# Altium PCB PCB_BSPD_Sensorboard.PcbDoc
Units mm, origin at the board's own origin, x right, y up, seen from the top; angles counter-clockwise.
Board outline 14.73 x 48.77 mm, 2 copper layers (Top Layer, Bottom Layer); 5 components, 3 nets, 15 pads, 0 vias.
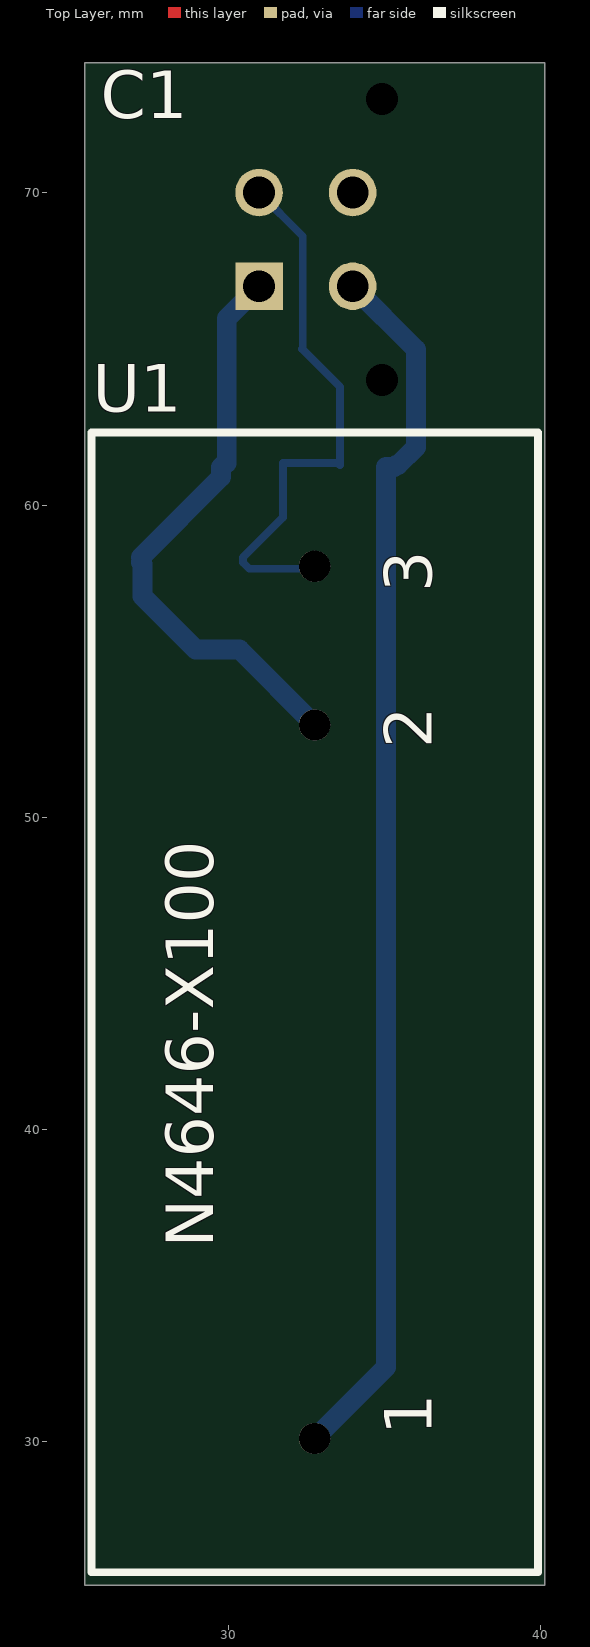
[diagram p0: Top Layer view]
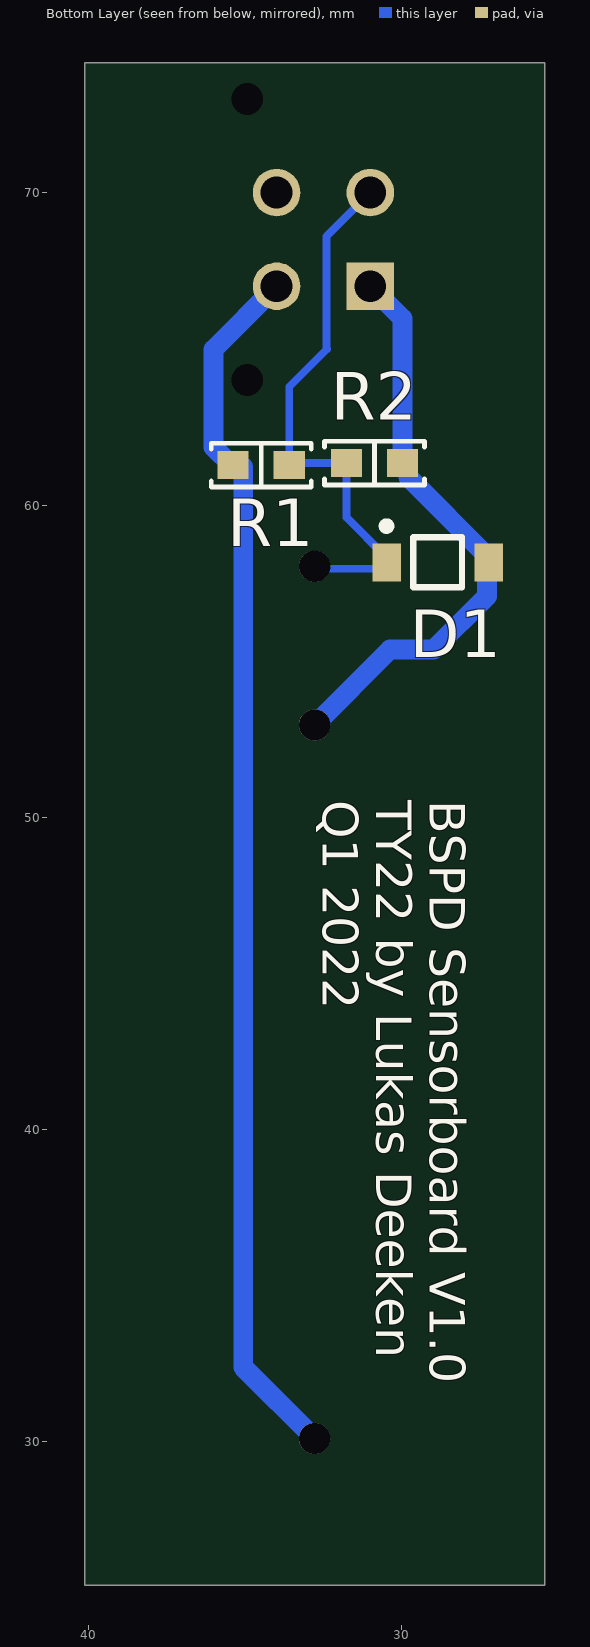
[diagram p1: Bottom Layer view, seen from below]

## Layer stack, top to bottom
Top Solder: solder mask 0.0102, Solder Resist, Dk 3.5
Top Layer: signal copper 0.0356
Dielectric 1: dielectric 0.32, FR-4, Dk 4.8
Bottom Layer: signal copper 0.0356
Bottom Solder: solder mask 0.0102, Solder Resist, Dk 3.5

## Board outline
25.4,74.168 40.132,74.168 40.132,25.4 25.4,25.4

## Design rules (kind name [scope] priority, off if disabled: settings)
Clearance [All] p1: gap=0.254 ignorepadtopadclearanceinfootprint=FALSE except(0: Arc-Hole Track-Hole SMDPad-Hole THPad-Hole Via-Hole Fill-Hole Poly-Hole Region-Hole Text-Hole)
PolygonConnect [All] p1: connectstyle=Relief reliefconductorwidth=0.254 reliefentries=4 polygonreliefangle="90 Angle" airgapwidth=0.254
RoutingVias [All] p1: holewidth=0.711 width=1.27 viastyle="Through Hole" minholewidth=0.711 minwidth=1.27 maxholewidth=0.711 maxwidth=1.27
SolderMaskExpansion [All] p1: expansion=0.102 istentingtop=FALSE
Width [All] p1: maxlimit=1.27 minlimit=0.254 preferedwidth=0.254
30 further rules are at their usual default settings.

## Components (designator, comment, footprint, x,y, rotation, side; value= is the part's Value field where it differs from the comment)
C1 "43045-0412" 43045-0412 32.485,68.508 r270 top
D1 "SZMMSZ4687T1G" ONSC-SOD-123-2-425-04_V 28.829,58.166 r180 bottom
R1 "SMD Resistor" "STACKPOLE CSR0603" 34.48,61.277 r0 bottom value=23,5k
R2 "SMD Resistor" "STACKPOLE CSR0603" 30.85,61.341 r0 bottom value=500
U1 "N4646-X100" N4646-X100 32.766,52.959 r90 top

## Footprints (in the part's own frame and the unit in brackets; to place one, negate y for a bottom-side part, rotate by r counter-clockwise, add the part's x,y. Pads: shape width x height; smd on the part's side, far side on the other; paste and mask are expansions set on the pad)
43045-0412 [mm]
  rect 1.524x1.524 hole 1.02: 1(1.5,-1.5)
  round 1.524 hole 1.02: 2(-1.5,-1.5) 3(1.5,1.5) 4(-1.5,1.5)
  round 0 hole 1.02 unplated: ""(-4.5,2.44) ""(4.5,2.44)
  body extent -5.07,-3.95 5.08,4.82, height 9.95
N4646-X100 [mm]
  round 1 hole 1: 1(-22.86,0) 2(0,0) 3(5.08,0)
  silkscreen extent -27.14,-7.15 9.36,7.15, body extent -27.13,-7.18 9.37,7.12, height 3
ONSC-SOD-123-2-425-04_V [mm] "SOD, 2-Leads, Body 2.69x1.6mm"
  rect 0.91x1.22 smd: 1(-1.635,0) 2(1.635,0)
  silkscreen extent -1.76,-0.8 0.78,1.28, body extent -1.35,-0.8 1.35,0.8, height 1.35
"STACKPOLE CSR0603" [mm] "Chip Resistor, 2-Leads, Body 1.60x0.80mm, IPC Medium Density"
  rect 1x0.9 smd: 1(-0.9,0) 2(0.9,0)
  silkscreen extent -1.6,-0.7 1.6,0.7, body extent -0.85,-0.4 0.85,0.4, height 0.45

## Part data
C1: library part "MicroFit3.0 4-Pin", "Molex Micro-Fit 3.0 4-Pin / 600V / 8.5A"
D1: library part CMP-1060-00576-1, "Zener Voltage Regulator, 500 mW, 2-Pin SOD-123, Pb-Free, Tape and Reel", Manufacturer="On Semiconductor", ComponentLink1Description="Manufacturer URL", ComponentLink1URL=http://www.onsemi.com/, ComponentLink2Description=Datasheet, ComponentLink2URL=http://www.onsemi.com/pub_link/Collateral/MMSZ4678T1-D.PDF, ComponentLink3Description="Package Specification", ComponentLink3URL=http://www.onsemi.com/pub_link/Collateral/425-04.PDF, DatasheetVersion="Rev. 9", Mounting Technology="Surface Mount", P Max (W)=0.5, PackageDescription="2-Pin SOD, Body 1.6 x 2.69 mm", PackageReference=SOD-123-2-425-04, PackageVersion="Rev. G, 10/2009", Packing="Tape and Reel", PartNumber=SZMMSZ4687T1G, RoHS=Pb-Free, VZ Typ (V)=4.3
R1 R2: "Resistor with multiple footprints", Power=0.1W

## Nets (pads, with @x,y where several pads share a name; then routed paths per layer and width w, separated by ;. In a path a pad name is that pad's centre, name@x,y a point inside that pad or via, vN(x,y) a via of type N, cw(c..) or ccw(c..) an arc to the next point about the centre after c; other vN are vias at no path point)
+24: C1.3 R1.2 U1.1 | length 39.5
  Bottom Layer w0.254: C1.3 33.985,66.853 C1.3@34.036,66.802
  Bottom Layer w0.635: U1.1 35.052,32.385 35.052,61.214 35.317,61.214 R1.2 35.431,61.277 36.007,61.854 36.007,64.986 C1.3
GND: C1.1 D1.2 R2.1 U1.2 | length 18.6
  Bottom Layer w0.635: D1.2 27.249,58.111 27.249,57.079 28.956,55.372 30.353,55.372 U1.2 ; D1.2@27.194,58.321 29.767,60.894 29.767,61.208 29.9,61.341 R2.1 29.95,65.973 C1.1
Signal: C1.2 D1.1 R1.1 R2.2 U1.3 | length 17.8
  Bottom Layer w0.254: C1.2 32.385,68.608 32.385,65.024 32.363,65.002 33.58,63.785 R1.1 33.517,61.341 R2.2 31.75,59.607 30.464,58.321 D1.1 30.671,57.959 32.719,57.959 32.766,57.912 U1.3@32.766,57.959
pads on no net: C1. C1.4

## Silkscreen, mask and mechanical layers (free items; w line width, h text height)
Bottom Overlay:
  text "BSPD Sensorboard V1.0 / TY22 by Lukas Deeken / Q1 2022" at 32.512,50.546 h1.14 r90
Board Outline:
  the board outline again, w0.2

## Text inside footprints (layer, text, board x,y; h text height)
U1: Top Overlay "1" at 36.512,30.213 h1.52 r90; Top Overlay "2" at 36.512,52.213 h1.52 r90; Top Overlay "3" at 36.512,57.213 h1.52 r90